# Altium PCB Arduino Nano.PcbDoc
Units mm, origin at the board's own origin, x right, y up, seen from the top; angles counter-clockwise.
Board outline 80 x 80 mm, 2 copper layers (Top Layer, Bottom Layer); 7 components, 30 nets, 128 pads, 0 vias.
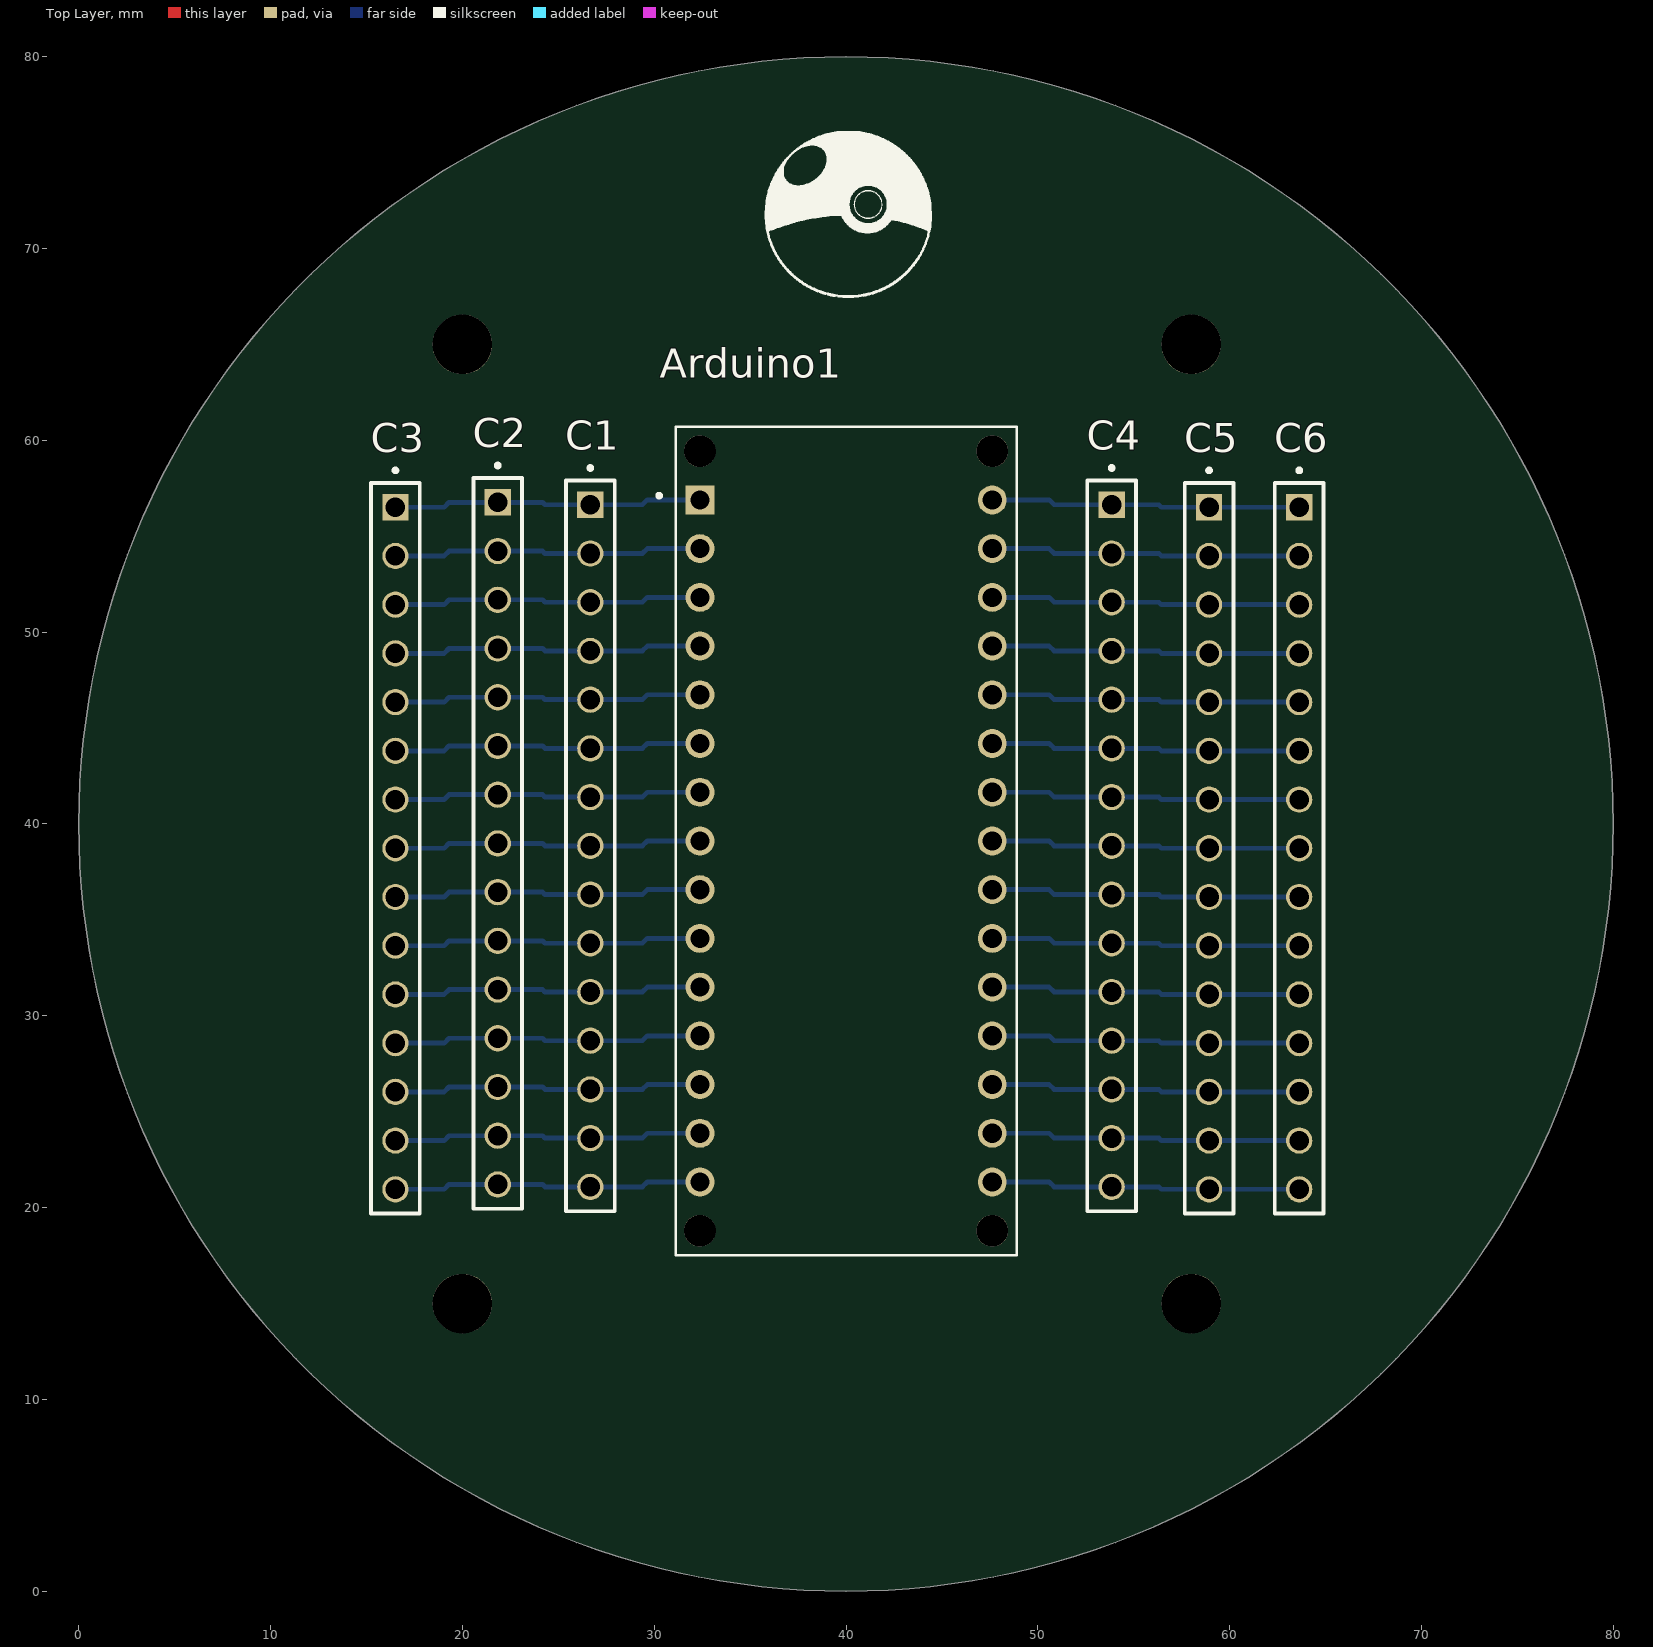
[diagram p0: Top Layer view]
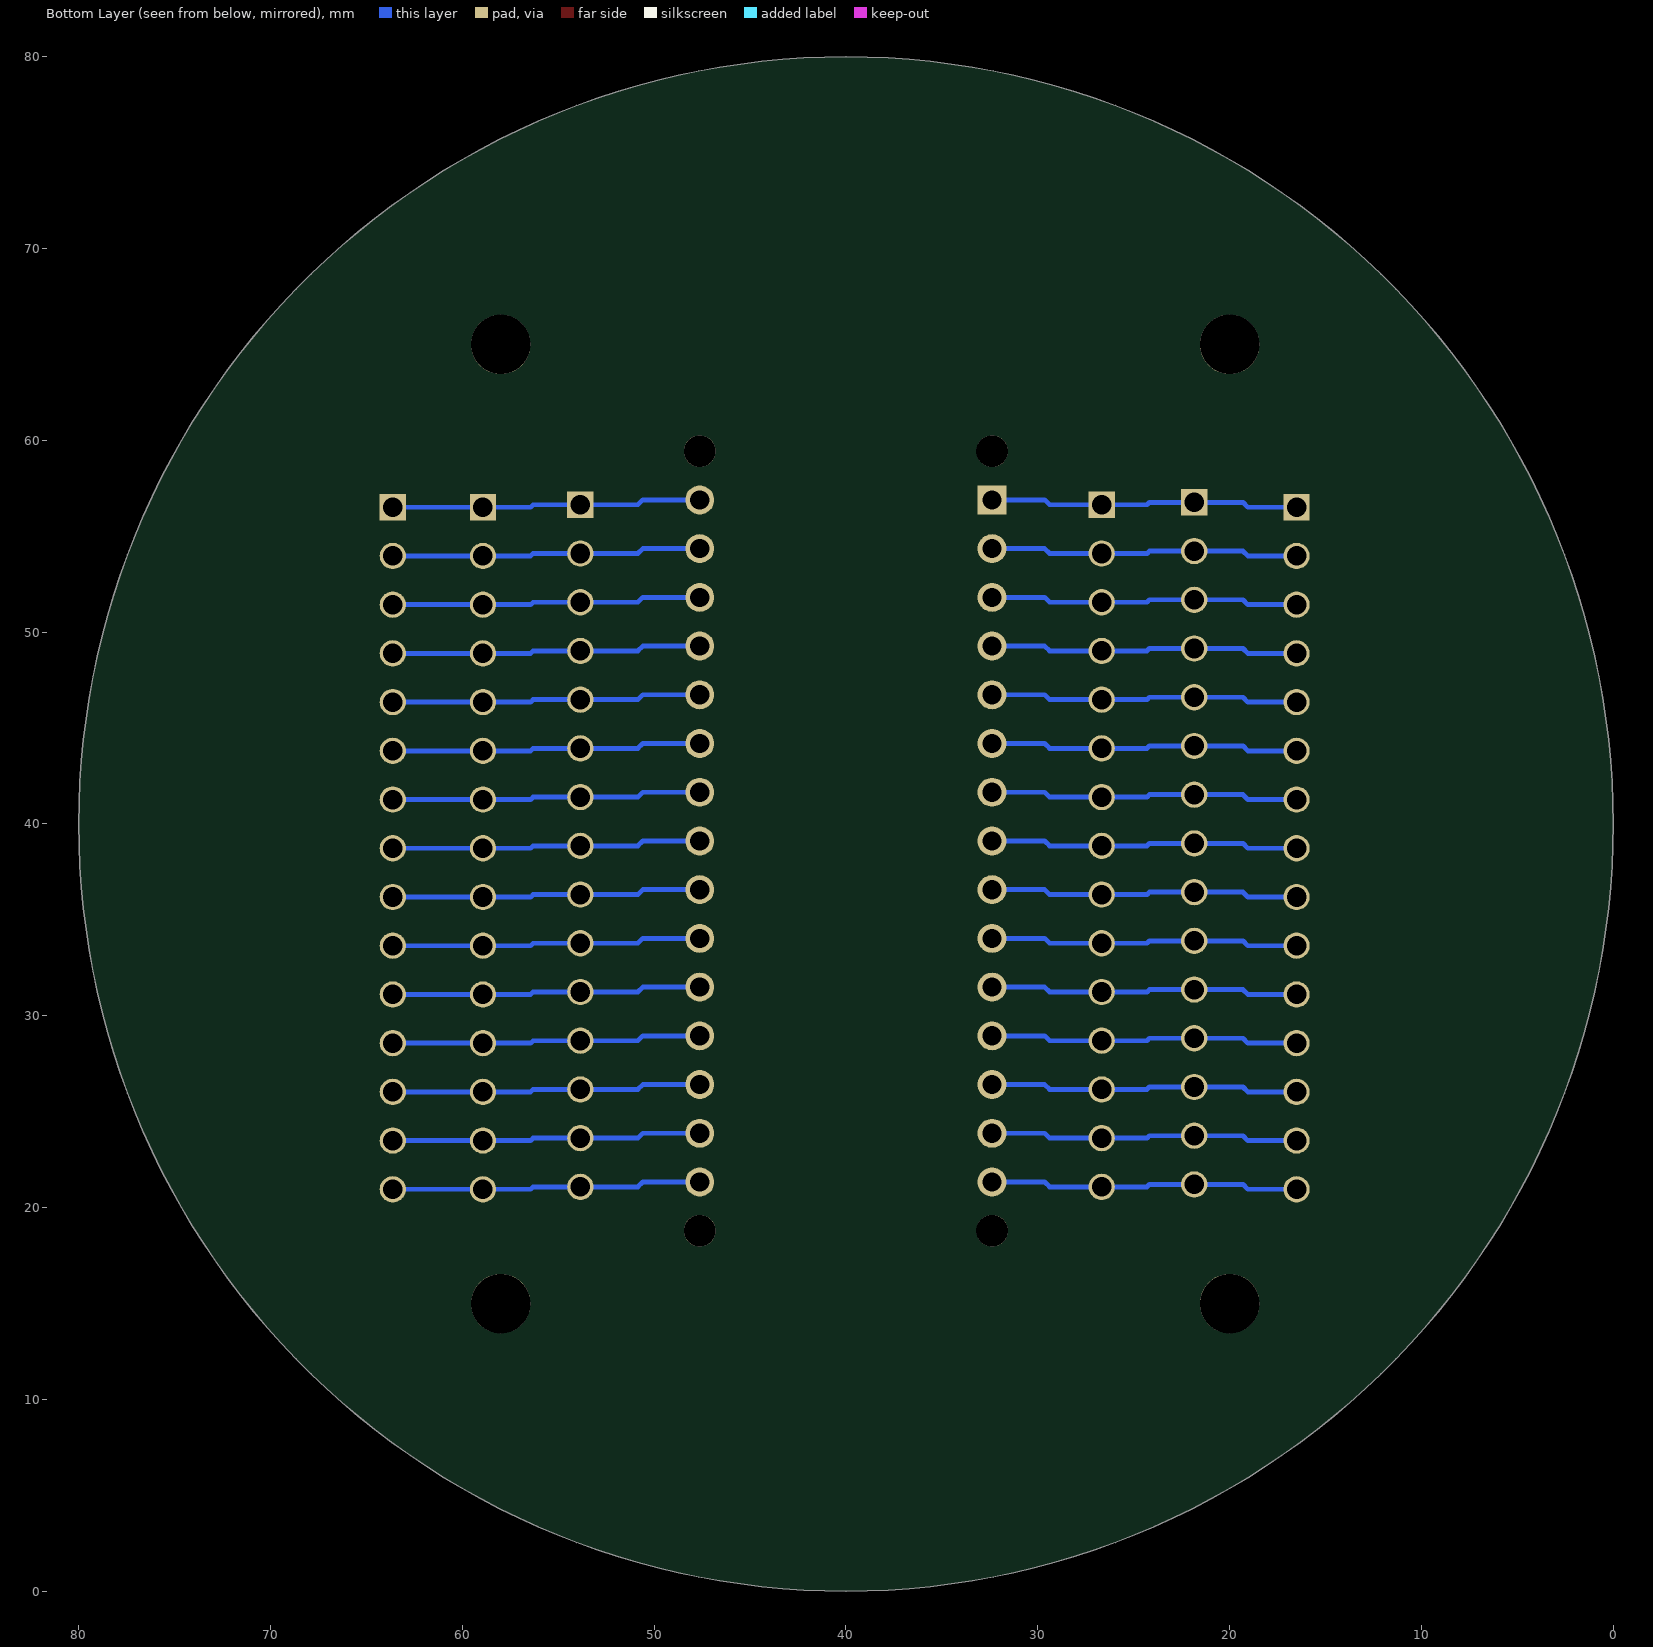
[diagram p1: Bottom Layer view, seen from below]

## Layer stack, top to bottom
Top Solder: solder mask 0.0102, Solder Resist, Dk 3.5
Top Layer: signal copper 0.0356
Dielectric 1: dielectric 0.32, FR-4, Dk 4.8
Bottom Layer: signal copper 0.0356
Bottom Solder: solder mask 0.0102, Solder Resist, Dk 3.5

## Board outline
40,0 cw(c40,40) 0,40 cw(c40,40) 40,80 cw(c40,40) 80,40 cw(c40,40)

## Design rules (kind name [scope] priority, off if disabled: settings)
Clearance [All] p1: gap=0.254 ignorepadtopadclearanceinfootprint=FALSE
PolygonConnect [All] p1: connectstyle=Relief reliefconductorwidth=0.254 reliefentries=4 polygonreliefangle="90 Angle" airgapwidth=0.254
RoutingVias [All] p1: holewidth=0.711 width=1.27 viastyle="Through Hole" minholewidth=0.711 minwidth=1.27 maxholewidth=0.711 maxwidth=1.27
SolderMaskExpansion [All] p1: expansion=0.102 istentingtop=FALSE
Width [All] p1: maxlimit=0.254 minlimit=0.254 preferedwidth=0.254
30 further rules are at their usual default settings.

## Components (designator, comment, footprint, x,y, rotation, side; value= is the part's Value field where it differs from the comment)
Arduino1 "Arduino" MODULE_A000005 40.005,39.116 r0 top
C1 "PPTC151LFBN-RC" SAMTEC_DW-15-12-G-S-807 26.67,56.642 r270 top
C2 "PPTC151LFBN-RC" SAMTEC_DW-15-12-G-S-807 21.844,56.769 r270 top
C3 "PPTC151LFBN-RC" SAMTEC_DW-15-12-G-S-807 16.51,56.515 r270 top
C4 "PPTC151LFBN-RC" SAMTEC_DW-15-12-G-S-807 53.848,56.642 r270 top
C5 "PPTC151LFBN-RC" SAMTEC_DW-15-12-G-S-807 58.928,56.515 r270 top
C6 "PPTC151LFBN-RC" SAMTEC_DW-15-12-G-S-807 63.627,56.515 r270 top

## Footprints (in the part's own frame and the unit in brackets; to place one, negate y for a bottom-side part, rotate by r counter-clockwise, add the part's x,y. Pads: shape width x height; smd on the part's side, far side on the other; paste and mask are expansions set on the pad)
MODULE_A000005 [mm]
  rect 1.508x1.508 / inner round 1.508 / far side rect 1.508x1.508 hole 1: 1(-7.62,17.78)
  round 1.508 hole 1: 2(-7.62,15.24) 3(-7.62,12.7) 4(-7.62,10.16) 5(-7.62,7.62) 6(-7.62,5.08) 7(-7.62,2.54) 8(-7.62,0) 9(-7.62,-2.54) 10(-7.62,-5.08) 11(-7.62,-7.62) 12(-7.62,-10.16) 13(-7.62,-12.7) 14(-7.62,-15.24) 15(-7.62,-17.78) 16(7.62,-17.78) 17(7.62,-15.24) 18(7.62,-12.7) 19(7.62,-10.16) 20(7.62,-7.62) 21(7.62,-5.08) 22(7.62,-2.54) 23(7.62,0) 24(7.62,2.54) 25(7.62,5.08) 26(7.62,7.62) 27(7.62,10.16) 28(7.62,12.7) 29(7.62,15.24) 30(7.62,17.78)
  round 1.651 hole 1.651 unplated: ""(-7.62,-20.32) ""(-7.62,20.32) ""(7.62,-20.32) ""(7.62,20.32)
  silkscreen extent -9.85,-21.59 8.89,21.59, body extent -9,-21.6 9,23.4, height 12.6
SAMTEC_DW-15-12-G-S-807 [mm]
  rect 1.37x1.37 hole 1.02: 01(0,0)
  round 1.37 hole 1.02: 02(2.54,0) 03(5.08,0) 04(7.62,0) 05(10.16,0) 06(12.7,0) 07(15.24,0) 08(17.78,0) 09(20.32,0) 10(22.86,0) 11(25.4,0) 12(27.94,0) 13(30.48,0) 14(33.02,0) 15(35.56,0)
  silkscreen extent -2.02,-1.27 36.83,1.27

## Part data
Arduino1: library part A000005, Supplier Part Number=1050-1001-ND, Category="Embedded Processors and Controllers", ComponentLink1Description=https://datasheet.ciiva.com/2398/arduinonanomanual23-2398236.pdf?src-supplier=Digikey, ComponentLink1URL=https://datasheet.ciiva.com/2398/arduinonanomanual23-2398236.pdf?src-supplier=Digikey, ComponentLink2Description=https://datasheet.ciiva.com/4926/arduino-arduinoboardnano-188748-4926316.pdf?src-supplier=Mouser, ComponentLink2URL=https://datasheet.ciiva.com/4926/arduino-arduinoboardnano-188748-4926316.pdf?src-supplier=Mouser, ComponentLink3Description=https://datasheet.ciiva.com/1414/810078-1414124.pdf?src-supplier=Newark, ComponentLink3URL=https://datasheet.ciiva.com/1414/810078-1414124.pdf?src-supplier=Newark, ComponentLink4Description=https://datasheet.ciiva.com/1336/1682238-1336473.pdf?src-supplier=Element14, ComponentLink4URL=https://datasheet.ciiva.com/1336/1682238-1336473.pdf?src-supplier=Element14, ComponentLink5Description=https://datasheet.ciiva.com/19455/2121148-19455443.pdf?src-supplier=Jameco, ComponentLink5URL=https://datasheet.ciiva.com/19455/2121148-19455443.pdf?src-supplier=Jameco, Manufacturer=Arduino, Manufacturer Part Number=A000005, Pricing="1=24.9 (USD)", RoHS=Yes, Stock=1289, Supplier=Digikey
C1 C2 C3 C4 C5 C6: "Board Connector, 15 Contact(s), 1 Row(s), Female, Straight, 0.1 inch Pitch, Solder Terminal, Locking", Manufacturer=Sullins, Manufacturer Series=PP, Rated Current (Signal)=3A, Supplier Part Number=S7013-ND, Body Breadth=0.094inch, Body Depth=0.334inch, Body Length=1.52inch, Category="Headers and Wire Housings", ComponentLink1Description=https://datasheet.ciiva.com:443/pdfs/VipMasterIC/IC/SUCS/SUCSS00270/SUCSS00270-1.pdf?src-supplier=IHS+Markit, ComponentLink1URL=https://datasheet.ciiva.com:443/pdfs/VipMasterIC/IC/SUCS/SUCSS00270/SUCSS00270-1.pdf?src-supplier=IHS+Markit, ComponentLink2Description=https://media.digikey.com/pdf/Data%20Sheets/Sullins%20PDFs/Female_Headers.100_DS.pdf?src-supplier=Digikey, ComponentLink2URL=https://media.digikey.com/pdf/Data%20Sheets/Sullins%20PDFs/Female_Headers.100_DS.pdf?src-supplier=Digikey, Connector Type="BOARD CONNECTOR", Contact Finish - Mating=SN, Contact Finish - Termination=TIN, Contact Gender=Female, Contact Material=Bronze, Contact Pattern=RECTANGULAR, Contact Style="SQ PIN-SKT", Insulation Material=Polyester, Manufacturer Part Number=PPTC151LFBN-RC, Mating Contact Pitch=0.1inch, Mounting Option 1=LOCKING, Mounting Style=STRAIGHT, Mounting Technology=Board, Number Of Connectors=1, Number of Contacts=15, Number Of PCB Rows=1, Number of Rows Loaded=1, PCB Contact Pattern=RECTANGULAR, Polarization Key="POLARIZED HOUSING", Pricing="1=0.99, 10=0.836, 80=0.75075, 440=0.61425, 1000=0.546, 5000=0.4875 (USD)", Reach SVHC Compliant=Yes, Reference Standard=UL, Reliability=COMMERCIAL, RoHS=Yes, RoHS Compliant=Yes, Stock=14275, Supplier=Digikey, Terminal Length=0.125inch, Terminal Pitch=2.54mm, Termination=Solder

## Free pads (board coordinates)
  round 3.1 hole 3.1: 1(20,65) 2(58,65) 3(20,15) 4(58,15)

## Nets (pads, with @x,y where several pads share a name; then routed paths per layer and width w, separated by ;. In a path a pad name is that pad's centre, name@x,y a point inside that pad or via, vN(x,y) a via of type N, cw(c..) or ccw(c..) an arc to the next point about the centre after c; other vN are vias at no path point)
1: Arduino1.1 C1.01 C2.01 C3.01 | length 16.1
  Bottom Layer w0.254: C3.01 19.05,56.515 19.304,56.769 C2.01 24.181,56.769 24.308,56.642 C1.01 29.388,56.642 29.642,56.896 Arduino1.1
2: Arduino1.2 C1.02 C2.02 C3.02 | length 16.1
  Bottom Layer w0.254: C3.02 19.05,53.975 19.304,54.229 C2.02 24.181,54.229 24.308,54.102 C1.02 29.388,54.102 29.642,54.356 Arduino1.2
3: Arduino1.3 C1.03 C2.03 C3.03 | length 16.1
  Bottom Layer w0.254: C3.03 19.05,51.435 19.304,51.689 C2.03 24.181,51.689 24.308,51.562 C1.03 29.388,51.562 29.642,51.816 Arduino1.3
4: Arduino1.4 C1.04 C2.04 C3.04 | length 16.1
  Bottom Layer w0.254: C3.04 19.05,48.895 19.304,49.149 C2.04 24.181,49.149 24.308,49.022 C1.04 29.388,49.022 29.642,49.276 Arduino1.4
5: Arduino1.5 C1.05 C2.05 C3.05 | length 16.1
  Bottom Layer w0.254: C3.05 19.05,46.355 19.304,46.609 C2.05 24.181,46.609 24.308,46.482 C1.05 29.388,46.482 29.642,46.736 Arduino1.5
6: Arduino1.6 C1.06 C2.06 C3.06 | length 16.1
  Bottom Layer w0.254: C3.06 19.05,43.815 19.304,44.069 C2.06 24.181,44.069 24.308,43.942 C1.06 29.388,43.942 29.642,44.196 Arduino1.6
7: Arduino1.7 C1.07 C2.07 C3.07 | length 16.1
  Bottom Layer w0.254: C3.07 19.05,41.275 19.304,41.529 C2.07 24.181,41.529 24.308,41.402 C1.07 29.388,41.402 29.642,41.656 Arduino1.7
8: Arduino1.8 C1.08 C2.08 C3.08 | length 16.1
  Bottom Layer w0.254: C3.08 19.05,38.735 19.304,38.989 C2.08 24.181,38.989 24.308,38.862 C1.08 29.388,38.862 29.642,39.116 Arduino1.8
9: Arduino1.9 C1.09 C2.09 C3.09 | length 16.1
  Bottom Layer w0.254: C3.09 19.05,36.195 19.304,36.449 C2.09 24.181,36.449 24.308,36.322 C1.09 29.388,36.322 29.642,36.576 Arduino1.9
10: Arduino1.10 C1.10 C2.10 C3.10 | length 16.1
  Bottom Layer w0.254: C3.10 19.05,33.655 19.304,33.909 C2.10 24.181,33.909 24.308,33.782 C1.10 29.388,33.782 29.642,34.036 Arduino1.10
11: Arduino1.11 C1.11 C2.11 C3.11 | length 16.1
  Bottom Layer w0.254: C3.11 19.05,31.115 19.304,31.369 C2.11 24.181,31.369 24.308,31.242 C1.11 29.388,31.242 29.642,31.496 Arduino1.11
12: Arduino1.12 C1.12 C2.12 C3.12 | length 16.1
  Bottom Layer w0.254: C3.12 19.05,28.575 19.304,28.829 C2.12 24.181,28.829 24.308,28.702 C1.12 29.388,28.702 29.642,28.956 Arduino1.12
13: Arduino1.13 C1.13 C2.13 C3.13 | length 16.1
  Bottom Layer w0.254: C3.13 19.05,26.035 19.304,26.289 C2.13 24.181,26.289 24.308,26.162 C1.13 29.388,26.162 29.642,26.416 Arduino1.13
14: Arduino1.14 C1.14 C2.14 C3.14 | length 16.1
  Bottom Layer w0.254: C3.14 19.05,23.495 19.304,23.749 C2.14 24.181,23.749 24.308,23.622 C1.14 29.388,23.622 29.642,23.876 Arduino1.14
15: Arduino1.15 C1.15 C2.15 C3.15 | length 16.1
  Bottom Layer w0.254: C3.15 19.05,20.955 19.304,21.209 C2.15 24.181,21.209 24.308,21.082 C1.15 29.388,21.082 29.642,21.336 Arduino1.15
16: Arduino1.16 C4.15 C5.15 C6.15 | length 16.2
  Bottom Layer w0.254: Arduino1.16 50.597,21.336 50.851,21.082 C4.15 56.312,21.082 56.439,20.955 C5.15 C6.15
17: Arduino1.17 C4.14 C5.14 C6.14 | length 16.2
  Bottom Layer w0.254: Arduino1.17 50.597,23.876 50.851,23.622 C4.14 56.312,23.622 56.439,23.495 C5.14 C6.14
18: Arduino1.18 C4.13 C5.13 C6.13 | length 16.2
  Bottom Layer w0.254: Arduino1.18 50.597,26.416 50.851,26.162 C4.13 56.312,26.162 56.439,26.035 C5.13 C6.13
19: Arduino1.19 C4.12 C5.12 C6.12 | length 16.2
  Bottom Layer w0.254: Arduino1.19 50.597,28.956 50.851,28.702 C4.12 56.312,28.702 56.439,28.575 C5.12 C6.12
20: Arduino1.20 C4.11 C5.11 C6.11 | length 16.2
  Bottom Layer w0.254: Arduino1.20 50.597,31.496 50.851,31.242 C4.11 56.312,31.242 56.439,31.115 C5.11 C6.11
21: Arduino1.21 C4.10 C5.10 C6.10 | length 16.2
  Bottom Layer w0.254: Arduino1.21 50.597,34.036 50.851,33.782 C4.10 56.312,33.782 56.439,33.655 C5.10 C6.10
22: Arduino1.22 C4.09 C5.09 C6.09 | length 16.2
  Bottom Layer w0.254: Arduino1.22 50.597,36.576 50.851,36.322 C4.09 56.312,36.322 56.439,36.195 C5.09 C6.09
23: Arduino1.23 C4.08 C5.08 C6.08 | length 16.2
  Bottom Layer w0.254: Arduino1.23 50.597,39.116 50.851,38.862 C4.08 56.312,38.862 56.439,38.735 C5.08 C6.08
24: Arduino1.24 C4.07 C5.07 C6.07 | length 16.2
  Bottom Layer w0.254: Arduino1.24 50.597,41.656 50.851,41.402 C4.07 56.312,41.402 56.439,41.275 C5.07 C6.07
25: Arduino1.25 C4.06 C5.06 C6.06 | length 16.2
  Bottom Layer w0.254: Arduino1.25 50.597,44.196 50.851,43.942 C4.06 56.312,43.942 56.439,43.815 C5.06 C6.06
26: Arduino1.26 C4.05 C5.05 C6.05 | length 16.2
  Bottom Layer w0.254: Arduino1.26 50.597,46.736 50.851,46.482 C4.05 56.312,46.482 56.439,46.355 C5.05 C6.05
27: Arduino1.27 C4.04 C5.04 C6.04 | length 16.2
  Bottom Layer w0.254: Arduino1.27 50.597,49.276 50.851,49.022 C4.04 56.312,49.022 56.439,48.895 C5.04 C6.04
28: Arduino1.28 C4.03 C5.03 C6.03 | length 16.2
  Bottom Layer w0.254: Arduino1.28 50.597,51.816 50.851,51.562 C4.03 56.312,51.562 56.439,51.435 C5.03 C6.03
29: Arduino1.29 C4.02 C5.02 C6.02 | length 16.2
  Bottom Layer w0.254: Arduino1.29 50.597,54.356 50.851,54.102 C4.02 56.312,54.102 56.439,53.975 C5.02 C6.02
30: Arduino1.30 C4.01 C5.01 C6.01 | length 16.2
  Bottom Layer w0.254: Arduino1.30 50.597,56.896 50.851,56.642 C4.01 56.312,56.642 56.439,56.515 C5.01 C6.01
pads on no net: Arduino1.

## Silkscreen, mask and mechanical layers (free items; w line width, h text height)
Top Overlay:
  drawing of 2 lines, arcs and shapes, not listed
Board outline:
  circle w0.254: c40,40 r40